# Altium PCB PCB1.PcbDoc
Units mil, origin at the board's own origin, x right, y up, seen from the top; angles counter-clockwise.
Board outline 6000 x 4000 mil, 2 copper layers (Top Layer, Bottom Layer); 22 components, 34 nets, 118 pads, 7 vias.
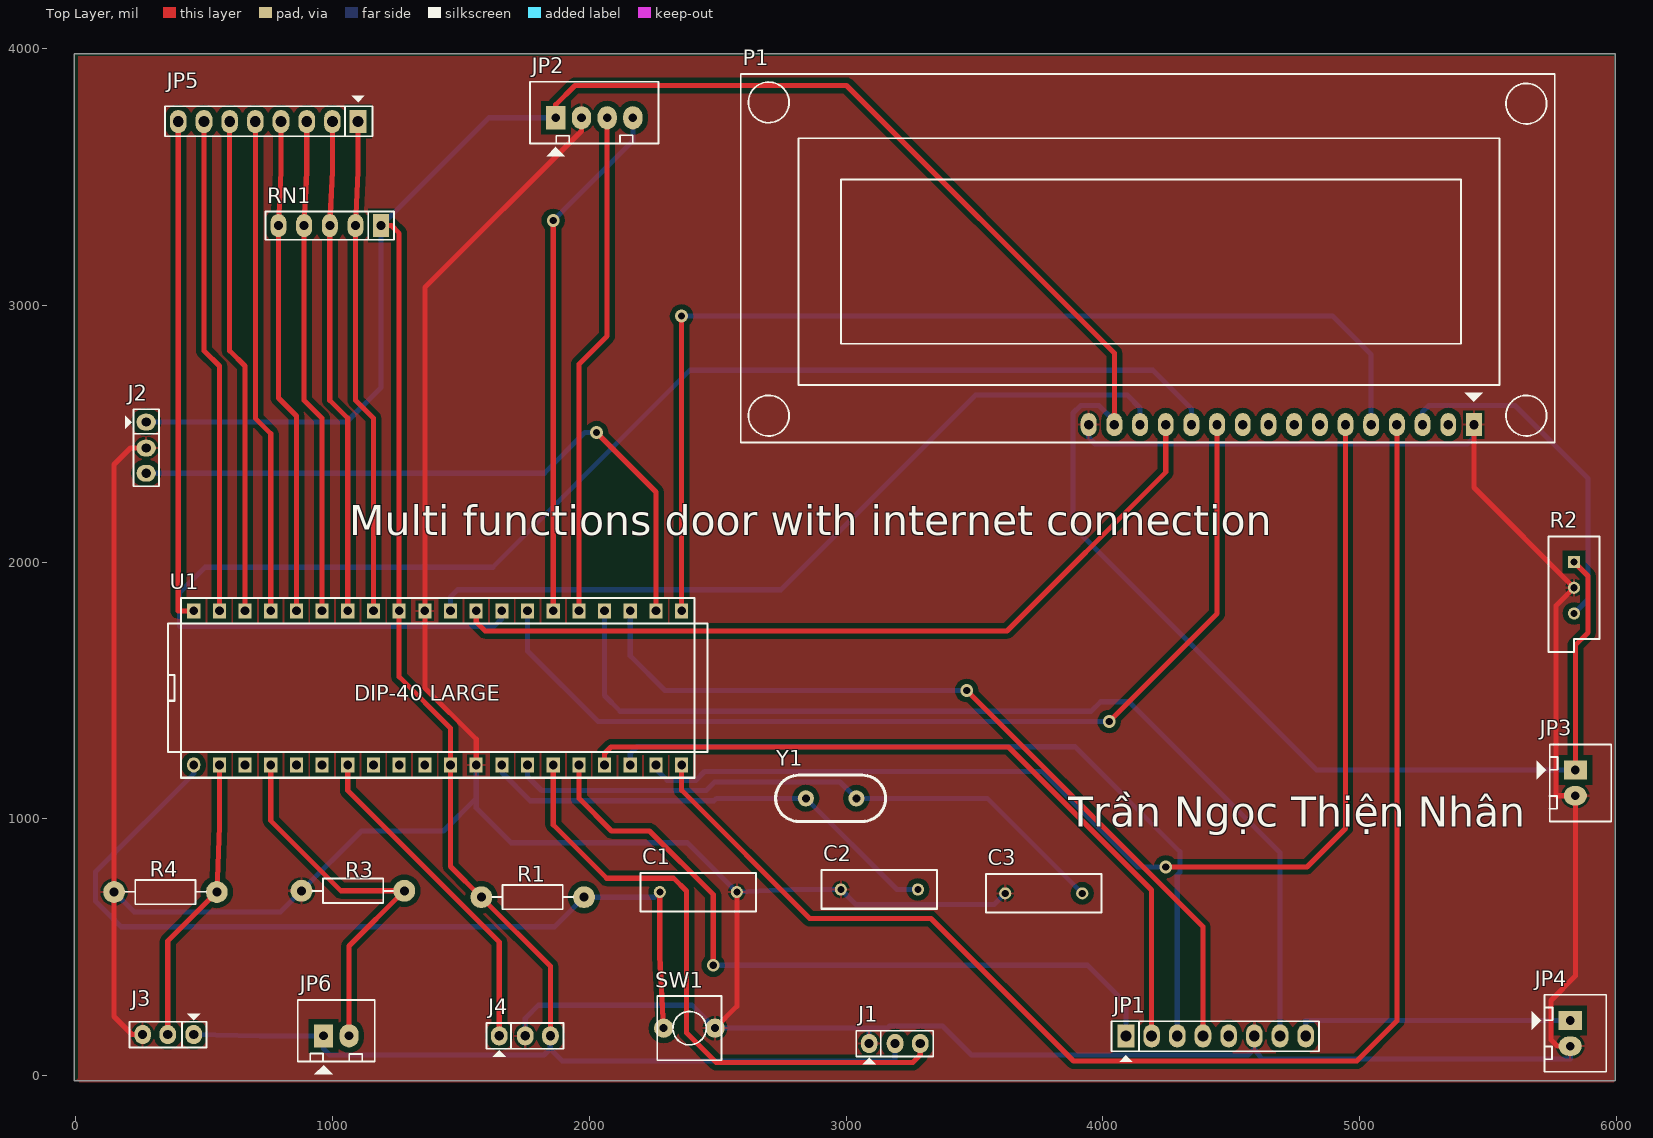
[diagram p0: Top Layer view]
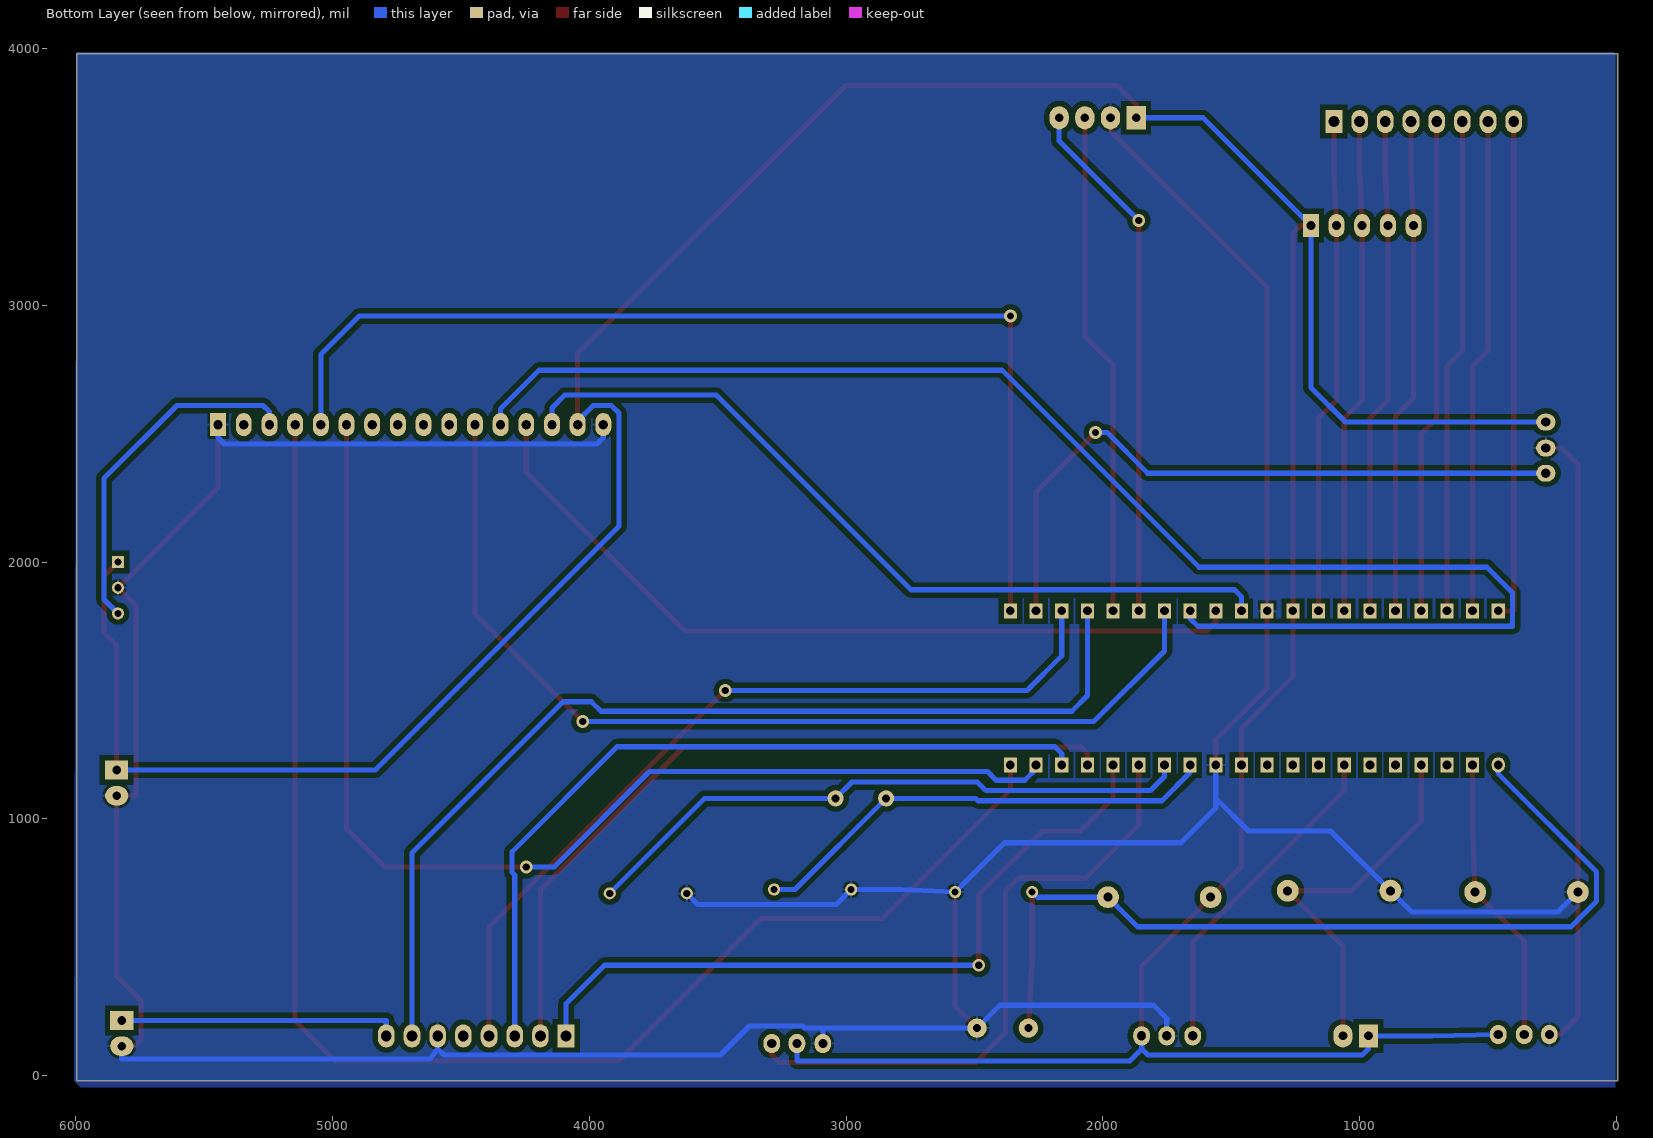
[diagram p1: Bottom Layer view, seen from below]
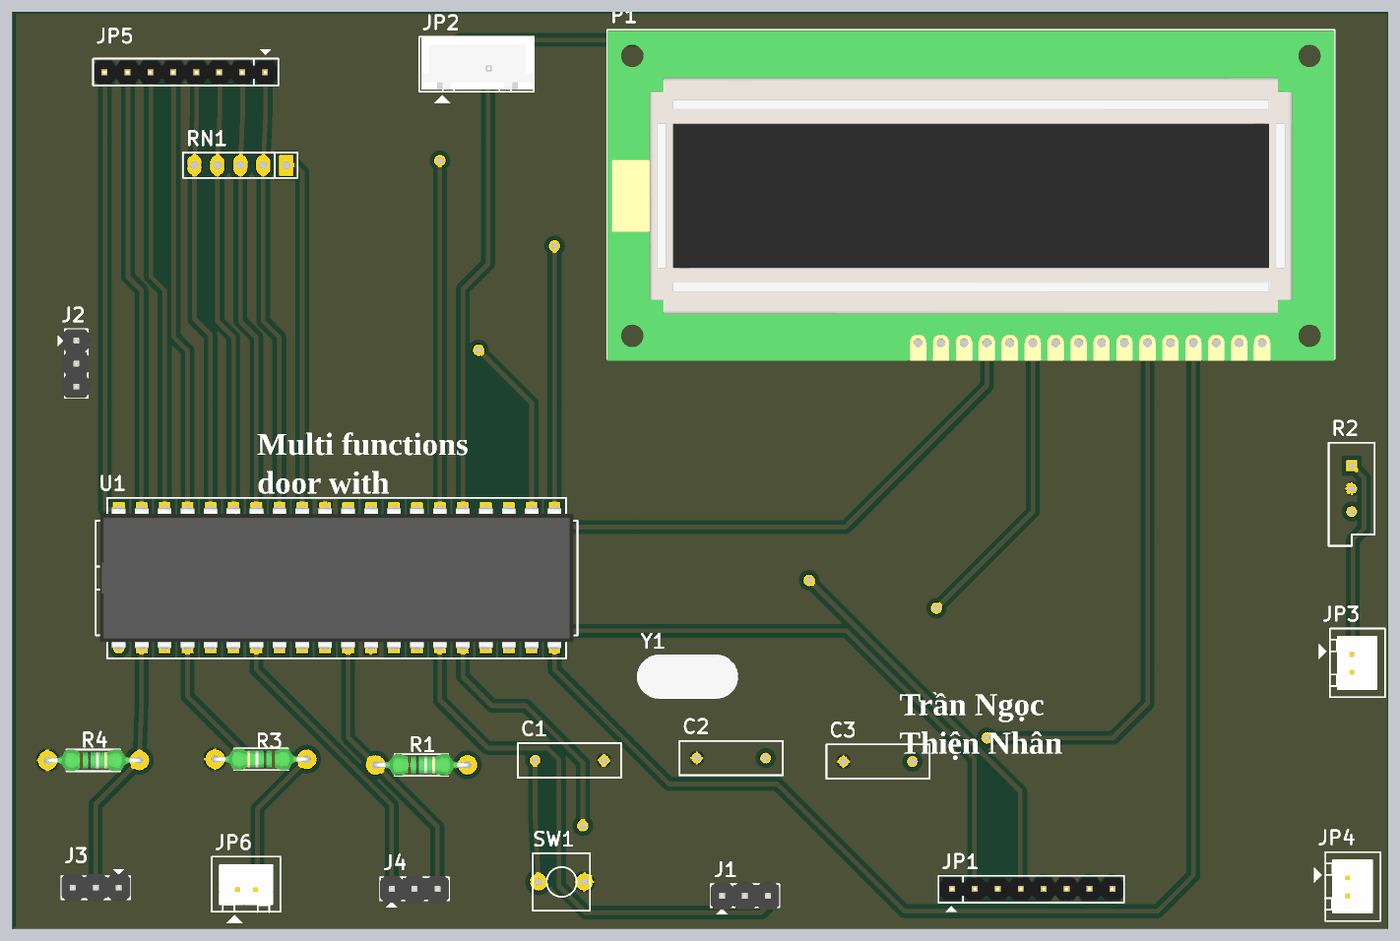
[diagram p2: 3D render of the assembled board from above, using the file's embedded part models]

## Layer stack, top to bottom
Top Solder: solder mask 0.4, Solder Resist, Dk 3.5
Top Layer: signal copper 1.4
Dielectric 1: dielectric 12.6, FR-4, Dk 4.8
Bottom Layer: signal copper 1.4
Bottom Solder: solder mask 0.4, Solder Resist, Dk 3.5

## Board outline
-5,-20 5995,-20 5995,3980 -5,3980

## Design rules (kind name [scope] priority, off if disabled: settings)
Clearance [All] p1: gap=20
PolygonConnect [All] p1: connectstyle=Relief reliefconductorwidth=10 reliefentries=4 polygonreliefangle="90 Angle" airgapwidth=10
RoomDefinition schematic [InComponentClass('schematic')] p1: confinementstyle=ConfineIn formatcopy=TRUE lockcomponents=FALSE outline 6799.53,-210 13789.53,-210 13789.53,3080 6799.53,3080
RoutingVias [All] p1: holewidth=28 width=50 viastyle="Through Hole" minholewidth=28 minwidth=50 maxholewidth=28 maxwidth=50
SolderMaskExpansion [All] p1: expansion=4
Width [All] p1: maxlimit=50 minlimit=10 preferedwidth=20
30 further rules are at their usual default settings.

## Components (designator, comment, footprint, x,y, rotation, side; value= is the part's Value field where it differs from the comment)
C1 "Cap" RAD-0.3 2425,715 r180 top
C2 "Cap" RAD-0.3 3130,725 r0 top
C3 "Cap" RAD-0.3 3770,710 r0 top
J1 "Jumper 3" JP3 3190,125 r0 top
J2 "Jumper 3" JP3 275,2445 r270 top
J3 "Jumper 3" JP3 360,160 r180 top
J4 "Jumper 3" JP3 1750,155 r0 top
JP1 "JP8 PIN" JP8 4090,155 r0 top
JP2 "JP4" CON4 1870,3730 r0 top
JP3 "JP2" CON2 5840,1190 r270 top
JP4 "JP2" CON2 5820,215 r270 top
JP5 "JP8 PIN" JP8 1100,3715 r180 top
JP6 "JP2" CON2 965,155 r0 top
P1 "LCD16x2" LCD16X2 5445,2535 r180 top
R1 "10k" RES-1/4W 1765,700 r180 top
R2 "RPot" VR5 5835,1900 r270 top
R3 "10k" RES-1/4W 1095,715 r0 top
R4 "10k" RES-1/4W 335,720 r180 top
RN1 "10K" RN4 1190,3310 r180 top
SW1 "SW" SW2 2490,185 r180 top
U1 "PIC16F877A-E/P" DIP.100/40/W.600/L2.100 1410,1510 r0 top
Y1 "20MHz" XTAL 2940,1080 r180 top

## Footprints (in the part's own frame and the unit in brackets; to place one, negate y for a bottom-side part, rotate by r counter-clockwise, add the part's x,y. Pads: shape width x height; smd on the part's side, far side on the other; paste and mask are expansions set on the pad)
CON2 [mil] "CON2"
  rect 75x90 hole 34: 1(0,0)
  oval 75x90 hole 34: 2(100,0)
  silkscreen extent -100,-150 200,140, body extent -68,-70 168,107, height 236
CON4 [mil] "CON4"
  rect 75x90 hole 34: 1(0,0)
  oval 75x90 hole 34: 2(100,0) 3(200,0) 4(300,0)
  silkscreen extent -100,-150 400,140, body extent -90,-90 398,136, height 276
DIP.100/40/W.600/L2.100 [mil]
  oval 51.18x59.06 hole 34: 1(-950,-300)
  rect 51x59 / inner round 58 / far side rect 51x59 hole 34: 2(-850,-300) 3(-750,-300) 4(-650,-300) 5(-550,-300) 6(-450,-300) 7(-350,-300) 8(-250,-300) 9(-150,-300) 10(-50,-300) 11(50,-300) 12(150,-300) 13(250,-300) 14(350,-300) 15(450,-300) 16(550,-300) 17(650,-300) 18(750,-300) 19(850,-300) 20(950,-300) 21(950,300) 22(850,300) 23(750,300) 24(650,300) 25(550,300) 26(450,300) 27(350,300) 28(250,300) 29(150,300) 30(50,300) 31(-50,300) 32(-150,300) 33(-250,300) 34(-350,300) 35(-450,300) 36(-550,300) 37(-650,300) 38(-750,300) 39(-850,300) 40(-950,300)
  silkscreen extent -1050,-350 1050,350, body extent -1032,-305 1032,305, height 224
JP3 [mil] "Jumper 3"
  oval 65x75 hole 36: 1(-100,0) 2(1,0) 3(99,0)
  silkscreen extent -150,-81 150,50, body extent -150,-60 150,55, height 355
JP8 [mil] "JP8"
  rect 65x90 hole 42: 1(0,0)
  oval 65x90 hole 42: 2(100,0) 3(200,0) 4(300,0) 5(400,0) 6(500,0) 7(600,0) 8(700,0)
  silkscreen extent -56,-100 752,57, body extent -48,-50 748,48, height 323
LCD16X2 [mil] "LCD dipslay 16x2, 16 pin"
  rect 62x90 hole 36: 1(0,0)
  oval 62x90 hole 36: 2(100,0) 3(200,0) 4(300,0) 5(400,0) 6(500,0) 7(600,0) 8(700,0) 9(800,0) 10(900,0) 11(1000,0) 12(1100,0) 13(1200,0) 14(1300,0) 15(1400,0) 16(1500,0)
  silkscreen extent -315,-1365 2855,70, body extent -315,-1360 2855,77, height 914
RAD-0.3 [mm] "Radial Cap, Thru-Hole; 2 Leads; 0.3 in Pin Spacing"
  round 1.2 hole 0.7: 1(-3.81,0) 2(3.81,0)
  silkscreen extent -5.71,-1.91 5.71,1.91
RES-1/4W [mil]
  round 85 hole 35: 1(-215,5) 2(185,5)
  silkscreen extent -173,-42 141,52, body extent -227,-42 197,52, height 95
RN4 [mil] "R SIP4, 5 Pin"
  rect 62x90 hole 35: 1(0,0)
  oval 62x90 hole 35: 2(100,0) 3(200,0) 4(300,0) 5(400,0)
  silkscreen extent -50,-55 450,55
SW2 [mil] "SW button 2pin, 250x 250 mil"
  round 75 hole 31: 1(0,0) 2(200,0)
  silkscreen extent -25,-125 225,125
VR5 [mm] "Thru-Hole; 3 Leads"
  rect 1.2x1.2 hole 0.7: 1(-2.54,0)
  round 1.2 hole 0.7: 2(0,0) 3(2.54,0)
  silkscreen extent -5.08,-2.54 6.35,2.54
XTAL [mm]
  round 1.6 hole 0.8: 1(-2.552,0.001) 2(2.448,0.001)
  silkscreen extent -5.44,-2.29 5.44,2.29, body extent -5.55,-2.32 5.62,2.35, height 3.63

## Part data
C1 C2 C3: "Capacitor"
J1 J2 J3 J4: library part JP3
JP1 JP5: library part JP8
JP2: library part Con4, "Connector 4"
JP3 JP4 JP6: library part Con2, "Connector 2"
P1: library part "LCD Text"
R1 R3 R4: library part "Tro 0603 1% 10k", "Dán"
R2: "Potentiometer"
RN1: library part RN4, "Resistor 4 (thanh)"
SW1: library part SW2, "Switch button 2 pin"
U1: "Enhanced FLASH Microcontroller, 8K (x14-Bit words) FLASH, 368 Bytes RAM, 40-Pin PDIP, Standard VDD Range, Extended Temperature"
Y1: library part XTAL, "Crystal Oscillator"

## Via types
v1: diameter 50, hole 28, Top Layer to Bottom Layer, 7 vias

## Nets (pads, with @x,y where several pads share a name; then routed paths per layer and width w, separated by ;. In a path a pad name is that pad's centre, name@x,y a point inside that pad or via, vN(x,y) a via of type N, cw(c..) or ccw(c..) an arc to the next point about the centre after c; other vN are vias at no path point)
3.3V: JP1.8 JP4.1 | length 1090
  Bottom Layer w20: JP1.8 4790,215 JP4.1
5V: J1.2 J2.1 J3.1 J4.3 JP2.1 JP3.1 JP6.1 P1.15 R1.2 R2.1 RN1.1 U1.11 U1.32 | length 15720.1
  Top Layer w20: RN1.1 1230,3310 1260,3280 U1.32 1260,1553 1460,1353 U1.11 1460,815 R1.2 1849,426 J4.3 ; JP2.1 1870,3781 1945,3856 3002,3856 4045,2813 P1.15 ; R2.1 5889,1946 5889,1725 5840,1676 JP3.1
  Bottom Layer w20: J2.1 1055,2545 1190,2680 RN1.1 1610,3730 JP2.1 ; J3.1 718,155 JP6.1 965,105 990,80 1824,80 1848,104 ; J1.2 3191,57 1895,57 1848,104 ; P1.15 4045,2549 3984,2610 3914,2610 3884,2580 3884,2139 4833,1190 JP3.1 ; 1848,104 1849,105 J4.3 1848,104
A0: J3.2 R4.1 U1.2 | length 1129.3
  Top Layer w20: J3.2 359,524 R4.1 560,973 U1.2
A2: JP6.2 R3.2 U1.4 | length 1504.1
  Top Layer w20: U1.4 760,993 1033,720 R3.2 1065,505 JP6.2
A5: J4.1 U1.7 | length 1299.4
  Top Layer w20: U1.7 1060,1110 1650,520 J4.1
B0: JP5.1 RN1.2 U1.33 | length 1934.2
  Top Layer w20: JP5.1 1100,3523 RN1.2 1090,2630 1160,2560 U1.33
B1: JP5.2 RN1.3 U1.34 | length 1934.2
  Top Layer w20: JP5.2 1000,3523 RN1.3 990,2630 1060,2560 U1.34
B2: JP5.3 RN1.4 U1.35 | length 1934.2
  Top Layer w20: JP5.3 900,3523 RN1.4 890,2630 960,2560 U1.35
B3: JP5.4 RN1.5 U1.36 | length 1934.2
  Top Layer w20: JP5.4 800,3523 RN1.5 790,2639 860,2569 U1.36
B4: JP5.5 U1.37 | length 1929.9
  Top Layer w20: JP5.5 700,2560 760,2500 U1.37
B5: JP5.6 U1.38 | length 1929.9
  Top Layer w20: JP5.6 600,2823 660,2763 U1.38
B6: JP5.7 U1.39 | length 1929.9
  Top Layer w20: JP5.7 500,2823 560,2763 U1.39
B7: JP5.8 U1.40 | length 1965
  Top Layer w20: JP5.8 400,1810 U1.40
C0: J1.3 U1.15 | length 2425.7
  Top Layer w20: U1.15 1860,977 2068.38,768.62 2329,768.62 2379,718.62 2379,167 2495,51 3260,51 3289,80 J1.3
CS: JP1.1 U1.16 | length 2877.5
  Top Layer w20: U1.16 1960,1080 2087,953 2235,953 2483,705 v1(2483,430)
  Bottom Layer w20: v1(2483,430) 3940,430 4090,280 JP1.1
D0: P1.6 U1.19 | length 4520.4
  Top Layer w20: v1(4245,813) 4795,813 4945,963 P1.6
  Bottom Layer w20: U1.19 2260,1194.5 2304,1150.5 2416,1150.5 2449.5,1184 3765,1184 4136,813 v1(4245,813)
D1: P1.4 U1.20 | length 5707.2
  Top Layer w20: U1.20 2360,1111 2859,612 3331,612 3886,57 4989,57 5145,213 P1.4
D2: P1.5 U1.21 | length 4168.1
  Top Layer w20: U1.21 v1(2360,2958)
  Bottom Layer w20: v1(2360,2958) 4895,2958 5045,2808 P1.5
D3: J2.3 U1.22 | length 2609.1
  Top Layer w20: v1(2029,2504) 2260,2273 U1.22
  Bottom Layer w20: J2.3 1825,2346 1983,2504 v1(2029,2504)
D4: P1.11 U1.27 | length 3864.9
  Top Layer w20: v1(4025,1379) 4445,1799 P1.11
  Bottom Layer w20: U1.27 1760,1654 2035,1379 v1(4025,1379)
D5: P1.12 U1.28 | length 5852.7
  Bottom Layer w20: U1.28 1660,1780 1630,1750 404,1750 404,1880 504,1980 1624.86,1980 2391.86,2747 4195,2747 4345,2597 P1.12
D6: P1.13 U1.29 | length 3183.5
  Top Layer w20: U1.29 1560,1767 1595,1732 3627,1732 4245,2350 P1.13
D7: P1.14 U1.30 | length 3150.9
  Bottom Layer w20: U1.30 1460,1865 1487,1892 2747,1892 3505,2650 4095,2650 4145,2600 P1.14
GND: C1.1 C2.1 C3.1 J1.1 J2.2 J3.3 J4.2 JP1.6 JP2.2 JP3.2 JP4.2 P1.1 P1.16 R2.2 R3.1 R4.2 SW1.1 U1.12 U1.31 | length 18734.1
  Top Layer w20: J3.3 220,160 150,230 R4.2 150,2380 214,2444 J2.2 ; U1.12 1560,1310 1360,1510 U1.31 1360,3069 1970,3679 JP2.2 ; SW1.1 2575,270 C1.1 ; P1.1 5445,2290 R2.2 5765,1830 5765,1090 JP3.2 5840,388 5745,293 5745,140 5770,115 JP4.2
  Bottom Layer w20: R4.2 227,638 798,638 R3.1 1113,953 1433,953 1560,1080 ; U1.12 1560,1080 ; J4.2 1751,223 1802,274 2401,274 SW1.1 3090,185 ; J1.1 3090,185 ; C3.1 3577,667 3038,667 C2.1 2788,725 C1.1 2383,907 1695,907 1560,1042 1560,1080 ; P1.16 3945,2485 3970,2460 5420,2460 5445,2485 P1.1 ; JP1.6 4590,105 ; JP4.2 5820,65 4620,65 4590,105 ; 3090,185 3161,185 3169,193 3376,193 3489,80 4565,80 4590,105
MCLR: C1.2 R1.1 SW1.2 U1.1 | length 3514.4
  Top Layer w20: C1.2 2275,465 SW1.2
  Bottom Layer w20: U1.1 460,1176 77,793 77,680 177,580 1865,580 R1.1 2255,695 C1.2
NetC2_2: C2.2 U1.13 Y1.2 | length 1846.3
  Bottom Layer w20: U1.13 1660,1180 1769.5,1070.5 2486.03,1070.5 2495.5,1079.97 Y1.2 3198.58,725 C2.2
NetC3_2: C3.2 U1.14 Y1.1 | length 2421.2
  Bottom Layer w20: U1.14 1760,1165 1814.5,1110.5 2455.5,1110.5 2489,1144 2976.44,1144 Y1.1 3550.03,1079.97 C3.2
NetP1_3: P1.3 R2.3 | length 1370.4
  Bottom Layer w20: P1.3 5245,2585 5270,2610 5605,2610 5889,2326 5889,1854 R2.3
RST: JP1.7 U1.24 | length 3957.2
  Bottom Layer w20: U1.24 2060,1480 2121,1419 3954.33,1419 3991.57,1456.25 4101.57,1456.25 4690,867.82 JP1.7
RX: JP2.4 U1.26 | length 2048.4
  Top Layer w20: U1.26 v1(1860,3330)
  Bottom Layer w20: v1(1860,3330) 2170,3640 JP2.4
SCK: JP1.2 U1.17 | length 2984.1
  Top Layer w20: U1.17 2060,1255 2085,1280 3633,1280 4190,723 JP1.2
SI: JP1.3 U1.18 | length 3086.5
  Bottom Layer w20: U1.18 2160,1255 2186,1281 3891.22,1281 4300,872.22 4300,791 4290,781 JP1.3
SO: JP1.4 U1.23 | length 3267
  Top Layer w20: v1(3470,1500) 4390,580 JP1.4
  Bottom Layer w20: U1.23 2160,1635 2295,1500 v1(3470,1500)
TX: JP2.3 U1.25 | length 1965.6
  Top Layer w20: U1.25 1960,2770 2070,2880 JP2.3
pads on no net: JP1.5 P1.2 P1.7 P1.8 P1.9 P1.10 U1.3 U1.5 U1.6 U1.8 U1.9 U1.10

## Polygon pours and split planes (outlines as drawn)
GND on Top Layer "Top poly" (solid, remove dead copper, pour order 0): 5990,3970 10,3970 10,-10 5,-15 15,-25 5990,-25
GND on Bottom Layer "Bottom poly" (solid, remove dead copper, pour order 2): 5995,3985 10,3985 5,3980 5,-45 5980,-45 6005,-20

## Silkscreen, mask and mechanical layers (free items; w line width, h text height)
Top Overlay:
  text "Multi functions door with internet connection" at 1065,2065 h200
  text "Trần Ngọc Thiện Nhân" at 3865,930 h200

## Text inside footprints (layer, text, board x,y; h text height)
U1: Top Overlay "DIP-40 LARGE" at 1085,1460 h59.05